# EAGLE board VALVE BREAKOUT (EAGLE 7.6.0)
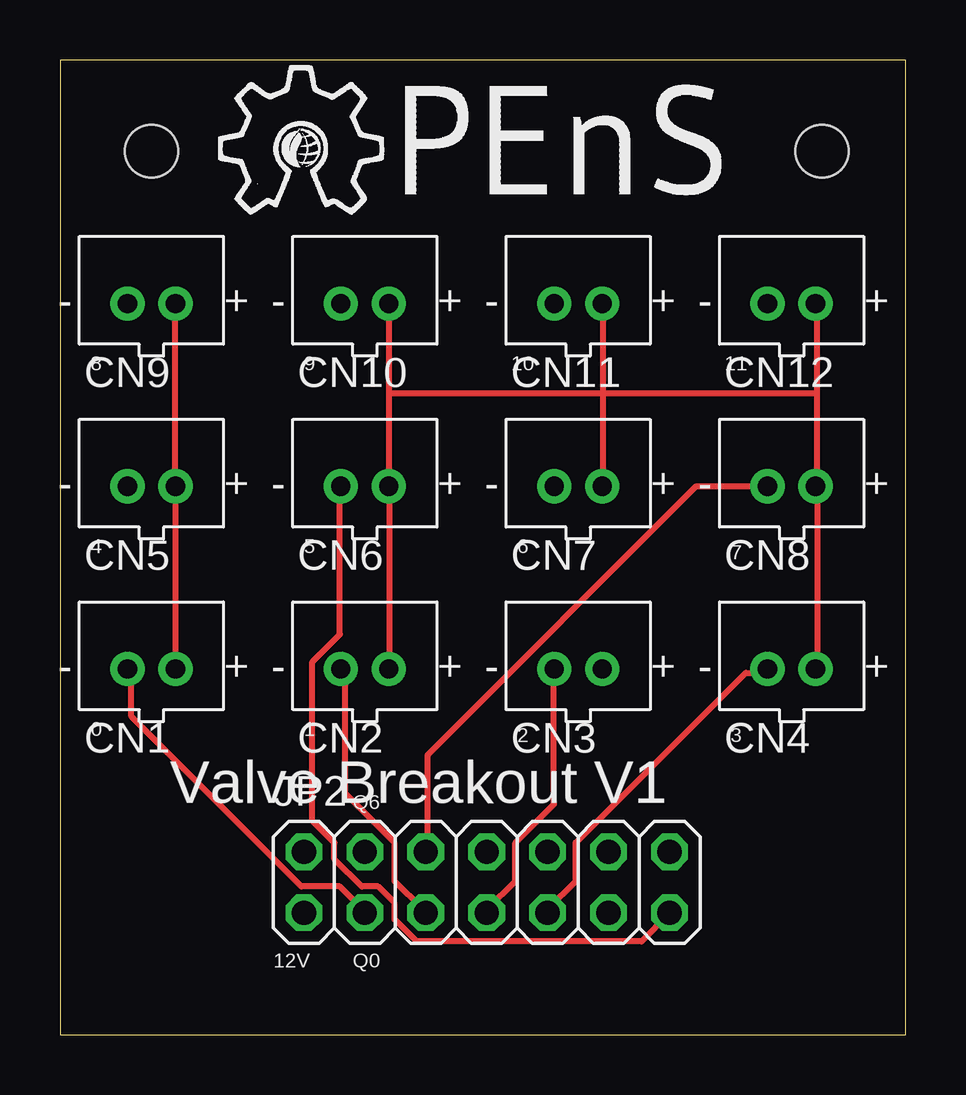
[diagram p0: board, top side]
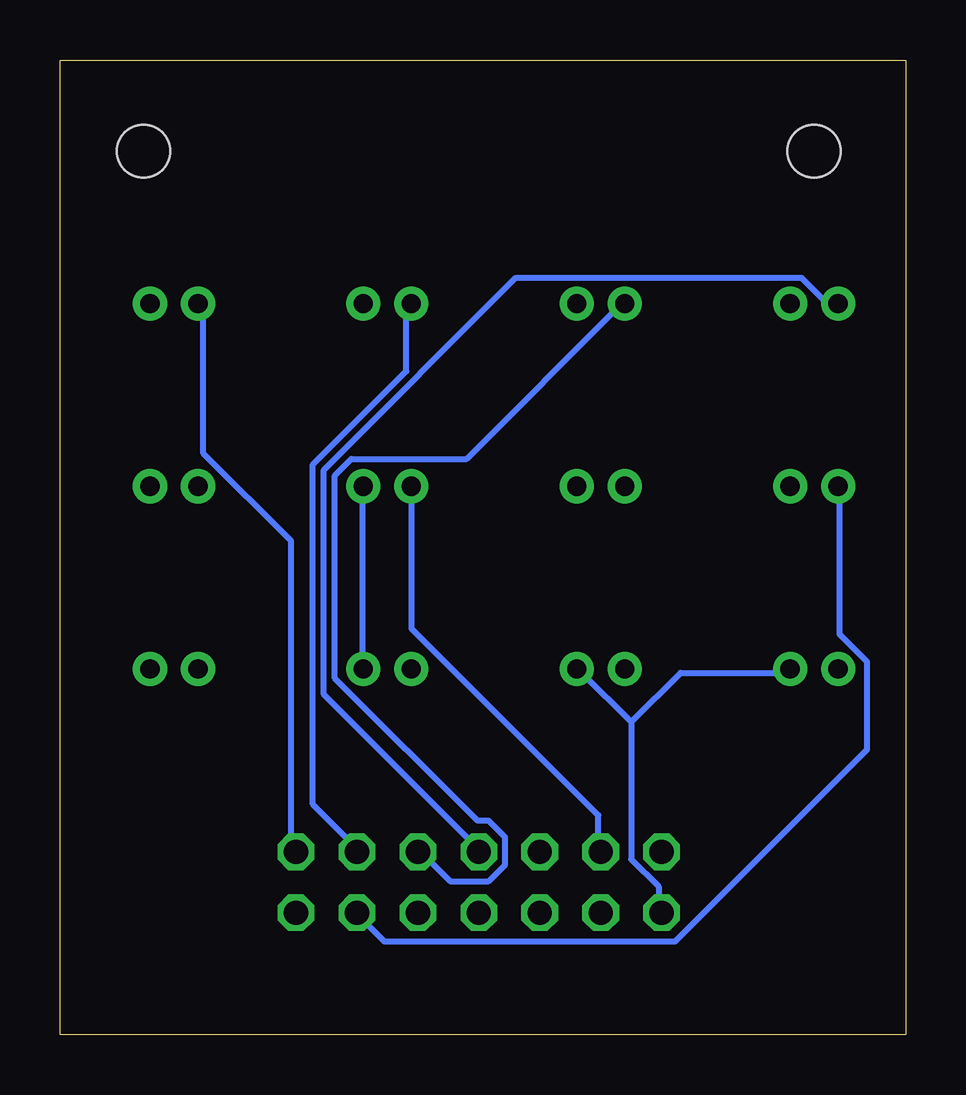
[diagram p1: board, bottom side, seen from below]

Size 35.23 x 40.63 mm. Coordinates in mm from the lower left corner, seen from the top.
Outline: 0,0 35.23,0 35.23,40.63 0,40.63 0,0
Copper layers (1*16): Top 0.035mm / dielectric 1.5mm / Bottom 0.035mm
Design rules "default": minimum track width 10mil, minimum drill 24mil, track to track 8mil, track to pad 8mil, pad to pad 8mil, via to via 8mil, smd to smd 8mil, copper to edge 40mil, drill to drill 8mil, minimum pad ring 10mil, minimum via ring 8mil, stop-mask expansion 4mil, vias tented up to drill 0mil, thermal gap 10mil
Holes 2.2 mm at 3.81,36.83 31.75,36.83

## Footprints (pad centres in the part's own frame; a part is rotated, then mirrored left to right if it is on the bottom)
JST-PH-2-THM = drill 0.8 pad 1.422: 1 1,0; 2 -1,0
2X07 = drill 1.016 octagon: 1 -7.62,-1.27; 2 -7.62,1.27; 3 -5.08,-1.27; 4 -5.08,1.27; 5 -2.54,-1.27; 6 -2.54,1.27; 7 0,-1.27; 8 0,1.27; 9 2.54,-1.27; 10 2.54,1.27; 11 5.08,-1.27; 12 5.08,1.27; 13 7.62,-1.27; 14 7.62,1.27

## Placement (x,y rotation side)
CN1  [JST-PH-2-THM]  3.81,15.24 0 top
CN2  [JST-PH-2-THM]  12.7,15.24 0 top
CN3  [JST-PH-2-THM]  21.59,15.24 0 top
CN4  [JST-PH-2-THM]  30.48,15.24 0 top
CN5  [JST-PH-2-THM]  3.81,22.86 0 top
CN6  [JST-PH-2-THM]  12.7,22.86 0 top
CN7  [JST-PH-2-THM]  21.59,22.86 0 top
CN8  [JST-PH-2-THM]  30.48,22.86 0 top
CN9  [JST-PH-2-THM]  3.81,30.48 0 top
CN10  [JST-PH-2-THM]  12.7,30.48 0 top
CN11  [JST-PH-2-THM]  21.59,30.48 0 top
CN12  [JST-PH-2-THM]  30.48,30.48 0 top
JP2  [2X07]  17.78,6.35 0 top
U$1  [OPENS-LOGO]  6.35,30.48 0 top

## Library data of the parts
CN1-CN12 = adafruit
JP2 = pinhead
U$1 = opens-logo

## Nets
Q0: CN1.2 JP2.3
Q1: CN2.2 JP2.5
Q2: CN3.2 JP2.7
Q3: CN4.2 JP2.9
Q4: CN5.2 JP2.11
Q5: CN6.2 JP2.13
Q6: CN7.2 JP2.4
Q7: CN8.2 JP2.6
Q8: CN9.2 JP2.8
Q9: CN10.2 JP2.10
Q10: CN11.2 JP2.12
Q11: CN12.2 JP2.14
VCC12: CN1.1 CN2.1 CN3.1 CN4.1 CN5.1 CN6.1 CN7.1 CN8.1 CN9.1 CN10.1 CN11.1 CN12.1 JP2.1

## Tracks (layer width: path | path; a pad name or v marks a point on that pad's centre or on a via)
Q0
  Top 0.254: CN1.2 2.97,15.09 2.97,13.26 10.06,6.17 11.66,6.17 12.57,5.26 JP2.3
Q1
  Top 0.254: CN2.2 11.89,15.09 11.89,10.06 13.95,8 13.95,6.4 15.09,5.26 JP2.5
Q2
  Top 0.254: CN3.2 20.57,15.09 20.57,9.6 18.97,8 18.97,6.4 17.83,5.26 JP2.7
Q3
  Top 0.254: CN4.2 29.26,15.09 28.57,15.09 21.49,8 21.49,6.4 20.34,5.26 JP2.9
Q4
  Bottom 0.254: CN5.2 2.74,22.86 2.74,16.69 1.6,15.54 1.6,11.89 9.6,3.89 21.72,3.89 22.86,5.03 JP2.11
Q5
  Top 0.254: CN6.2 11.66,22.86 11.66,16.69 10.52,15.54 10.52,8.91 11.43,8 11.43,7.32 12.57,6.17 13.26,6.17 13.95,5.49 13.95,4.8 14.86,3.89 24.23,3.89 25.38,5.03 JP2.13
Q6
  Bottom 0.254: CN7.2 20.57,22.86 20.57,16.92 12.8,9.14 12.8,7.77 JP2.4
Q7
  Top 0.254: CN8.2 26.52,22.86 15.32,11.66 15.32,7.77 JP2.6
Q8
  Bottom 0.254: CN9.2 2.97,30.63 3.43,30.63 4.34,31.55 16.23,31.55 24.23,23.55 24.23,14.17 17.83,7.77 JP2.8
Q9
  Bottom 0.254: CN10.2 11.89,30.4 18.29,24 23.09,24 23.77,23.32 23.77,14.86 17.83,8.91 17.37,8.91 16.69,8.23 16.69,7.09 17.37,6.4 18.97,6.4 20.12,7.54 JP2.10
Q10
  Bottom 0.254: CN11.2 20.8,30.4 20.8,27.66 24.69,23.77 24.69,9.6 22.86,7.77 JP2.12
Q11
  Bottom 0.254: CN12.2 29.26,30.4 29.26,24.23 25.6,20.57 25.6,7.77 JP2.14
VCC12
  Top 0.254: 31.55,22.86 31.55,15.32 CN4.1 | 31.55,22.86 31.55,26.75 | 31.55,26.75 31.55,30.4 CN12.1 | 31.55,22.86 CN8.1 | 22.63,26.75 22.63,22.86 CN7.1 | 22.63,26.75 22.63,30.4 CN11.1 | CN5.1 4.8,15.32 CN1.1 | CN5.1 4.8,30.4 CN9.1 | CN5.1 | 13.72,22.86 13.72,15.32 CN2.1 | 13.72,22.86 13.72,26.75 | 13.72,26.75 13.72,30.4 CN10.1 | 13.72,22.86 CN6.1 | 13.72,26.75 22.63,26.75 | 22.63,26.75 31.55,26.75
  Bottom 0.254: CN3.1 22.63,15.32 22.63,22.86 CN7.1 | 11.43,13.03 11.43,7.32 10.29,6.17 10.29,5.26 JP2.1 | 11.43,13.03 13.49,15.09 CN2.1 | 11.43,13.03 9.37,15.09 5.03,15.09 CN1.1

## Text on the board
tPlace: 8 | 9 | 10 | 11 | 4 | 5 | 6 | 7 | 0 | 1 | 2 | 3 | Valve Breakout V1 | Q6 | 12V | Q0